# Altium PCB banana2USB_01.PcbDoc
Units mm, origin at the board's own origin, x right, y up, seen from the top; angles counter-clockwise.
Board outline 45.3 x 18 mm, 2 copper layers (Top Layer, Bottom Layer); 4 components, 5 nets, 18 pads, 35 vias.
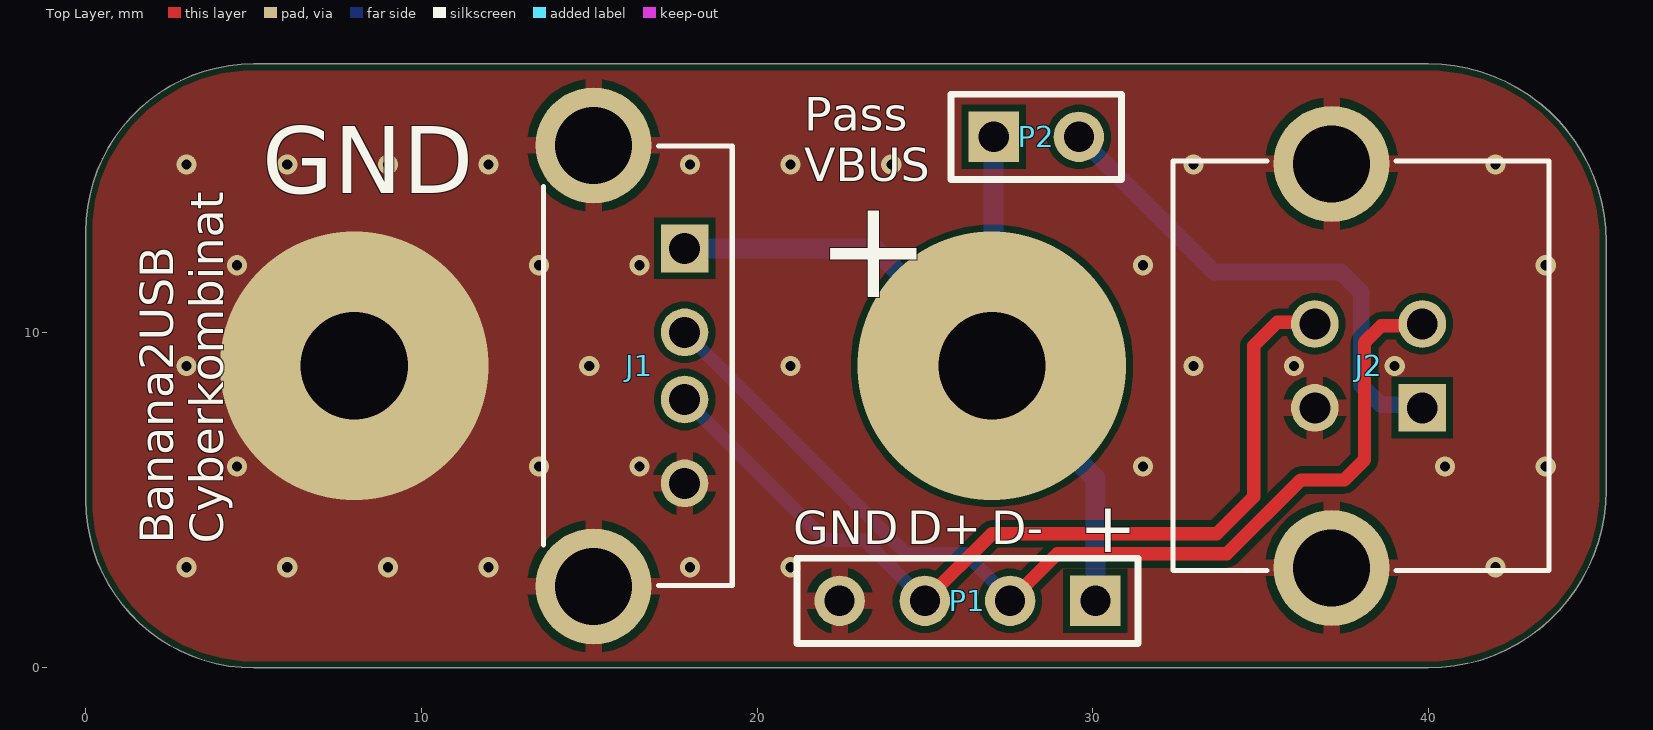
[diagram p0: Top Layer view]
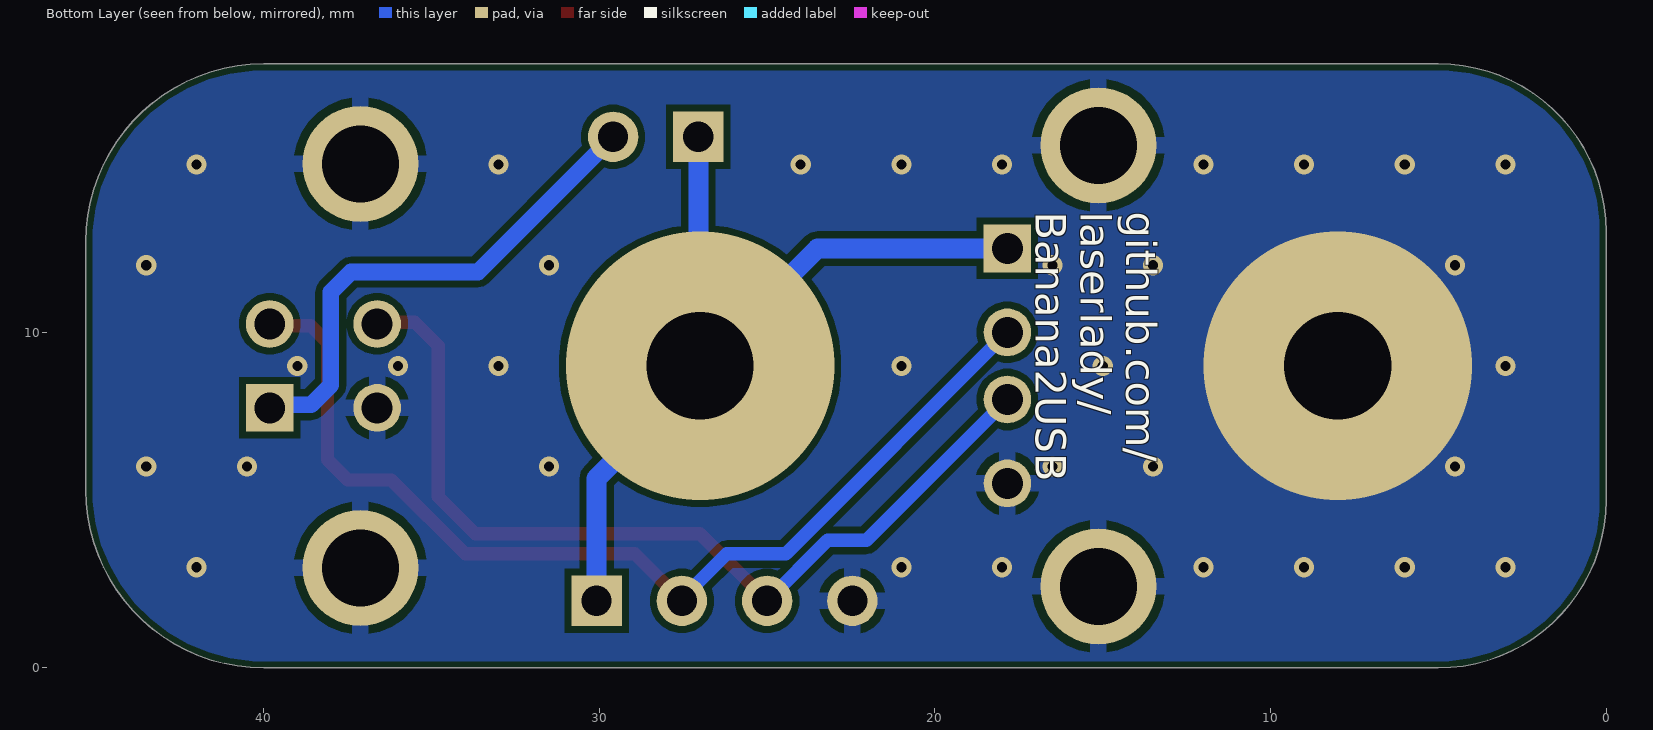
[diagram p1: Bottom Layer view, seen from below]

## Layer stack, top to bottom
Top Solder: solder mask 0.0102, Solder Resist, Dk 3.5
Top Layer: signal copper 0.0356
Dielectric 1: dielectric 0.32, FR-4, Dk 4.8
Bottom Layer: signal copper 0.0356
Bottom Solder: solder mask 0.0102, Solder Resist, Dk 3.5

## Board outline
40,0 ccw(c40,5.3) 45.3,5.3 45.3,12.7 ccw(c40,12.7) 40,18 5,18 ccw(c5,13) 0,13 0,5 ccw(c5,5) 5,0

## Design rules (kind name [scope] priority, off if disabled: settings)
BoardOutlineClearance [All] p1: gap=0.2 ignorepadtopadclearanceinfootprint=FALSE except(0.4: Arc-SplitBarrior Arc-SplitContinuation Track-SplitBarrior Track-SplitContinuation SMDPad-SplitBarrior SMDPad-SplitContinuation THPad-SplitBarrior THPad-SplitContinuation Via-SplitBarrior Via-SplitContinuation Fill-SplitBarrior Fill-SplitContinuation Poly-SplitBarrior Poly-SplitContinuation Region-SplitBarrior Region-SplitContinuation Text-SplitBarrior Text-SplitContinuation)
Clearance [All] p1: gap=0.2 ignorepadtopadclearanceinfootprint=FALSE except(0.127: Arc-Arc Arc-Track Track-Track SMDPad-SMDPad)
HoleSize [All] p1: absolutevalues=TRUE maxlimit=6.3 minlimit=0.3 maxpercent=80.000 minpercent=20.000
MinimumAnnularRing [All] p1: minimumring=0.15
MinimumSolderMaskSliver [All] p1: minsoldermaskwidth=0.1
PolygonConnect PolygonConnect_1 [All] p1: thpad.connectstyle=Relief thpad.reliefconductorwidth=0.508 thpad.reliefentries=4 thpad.polygonreliefangle="90 Angle" thpad.airgapwidth=0.254 smdpad.connectstyle=Relief smdpad.reliefconductorwidth=0.508 smdpad.reliefentries=4 smdpad.polygonreliefangle="90 Angle" smdpad.airgapwidth=0.254 via.connectstyle=Direct via.reliefconductorwidth=0.508 via.reliefentries=4 via.polygonreliefangle="90 Angle" via.airgapwidth=0.254
RoutingCorners [All] p1: cornerstyle=Round minsetback=2.54 maxsetback=2.54
RoutingVias [All] p1: holewidth=0.5 width=1 viastyle="Through Hole" minholewidth=0.2 minwidth=0.45 maxholewidth=1 maxwidth=2
SilkToSilkClearance [All] p1: silktosilkclearance=0.1
SilkToSolderMaskClearance [IsPad] p1: minsilkscreentomaskgap=0.1 clearancetoexposedcopper=TRUE
SolderMaskExpansion [All] p1: expansion=0.102 istentingtop=FALSE
Width [All] p1: maxlimit=2.54 minlimit=0.089 preferedwidth=0.381
25 further rules are at their usual default settings.

## Components (designator, comment, footprint, x,y, rotation, side; value= is the part's Value field where it differs from the comment)
J1 "USB 2.0 Type A" 614004135023 16.5,9 r270 top
J2 "USB 2.0 Type B" 61400413321 38,9 r270 top
P1 "Header 4" HDR1X4 30.08,2 r180 top
P2 "Header 2" HDR1X2 27.05,15.825 r0 top

## Footprints (in the part's own frame and the unit in brackets; to place one, negate y for a bottom-side part, rotate by r counter-clockwise, add the part's x,y. Pads: shape width x height; smd on the part's side, far side on the other; paste and mask are expansions set on the pad)
61400413321 [mm] "USB 2.0 Type B Vertical"
  rect 1.42x1.42 hole 0.92: 1(1.25,1.82)
  round 1.42 hole 0.92: 2(-1.25,1.82) 3(-1.25,-1.38) 4(1.25,-1.38)
  round 3.45 hole 2.3: S1(-6.02,-0.88) S2(6.02,-0.88)
  silkscreen extent -6.1,-5.6 6.1,5.6, body extent -7.35,-5.6 7.35,5.6, height 16.15
614004135023 [mm] "USB 2.0 Type A Vertical"
  rect 1.42x1.42 hole 0.92: 1(-3.5,1.34)
  round 1.42 hole 0.92: 2(-1,1.34) 3(1,1.34) 4(3.5,1.34)
  round 3.45 hole 2.3: S1(-6.57,-1.37) S2(6.57,-1.37)
  silkscreen extent -6.55,-2.86 6.55,2.76, body extent -8,-3.56 8,3.56, height 15.02
HDR1X2 [mm] "Connector; Header; 2 Position"
  rect 1.5x1.5 hole 0.9: 1(0,0)
  round 1.5 hole 0.9: 2(2.54,0)
  silkscreen extent -1.27,-1.27 3.81,1.27
HDR1X4 [mm] "Connector; Header; 4 Position"
  rect 1.5x1.5 hole 0.9: 1(0,0)
  round 1.5 hole 0.9: 2(2.54,0) 3(5.08,0) 4(7.62,0)
  silkscreen extent -1.27,-1.27 8.89,1.27

## Part data
J1: library part 614004135023, "USB 2.0 Type A Vertical THT WR-COM", Operating Temperature="-40 to 105 degC", Rated Current="1.5 A", ComponentLink1Description=Manufacturer, ComponentLink1URL=http://www.we-online.de, ComponentLink2Description=Datasheet, ComponentLink2URL=http://katalog.we-online.de/em/datasheet/614004135023.pdf, Gender=Female, Interface Type="USB 2.0 Type A", Mounting Technology=THT, Orientation=Vertical, Packaging=Tray, Part Number=614004135023, Published Date="May 2018", Publisher="Wurth Elektronik"
J2: library part 61400413321, "USB 2.0 Type B Vertical THT WR-COM", Operating Temperature="-40 to 105 degC", Rated Current="1.5 A", ComponentLink1Description=Manufacturer, ComponentLink1URL=http://www.we-online.de, ComponentLink2Description=Datasheet, ComponentLink2URL=http://katalog.we-online.de/em/datasheet/61400413321.pdf, Gender=Female, Interface Type="USB 2.0 Type B", Mounting Technology=THT, Orientation=Vertical, Packaging=Tray, Part Number=61400413321, Published Date="May 2018", Publisher="Wurth Elektronik"
P1: "Header, 4-Pin", LatestRevisionDate=17-Jul-2002, LatestRevisionNote="Re-released for DXP Platform.", Publisher="Altium Limited"
P2: "Header, 2-Pin", LatestRevisionDate=17-Jul-2002, LatestRevisionNote="Re-released for DXP Platform.", Publisher="Altium Limited"

## Via types
v1: diameter 0.6, hole 0.3, Top Layer to Bottom Layer, tented both sides, 33 vias
v2: diameter 8, hole 3.2, Top Layer to Bottom Layer, 2 vias

## Nets (pads, with @x,y where several pads share a name; then routed paths per layer and width w, separated by ;. In a path a pad name is that pad's centre, name@x,y a point inside that pad or via, vN(x,y) a via of type N, cw(c..) or ccw(c..) an arc to the next point about the centre after c; other vN are vias at no path point)
D+: J1.3 J2.3 P1.3 | length 27.4
  Top Layer w0.4: P1.3 27,4 33.7,4 34.8,5.1 34.8,9.6 35.5,10.3 36.57,10.3 J2.3
  Bottom Layer w0.4: J1.3 22.04,3.8 23.2,3.8 P1.3
D-: J1.2 J2.2 P1.2 | length 30.8
  Top Layer w0.4: P1.2 28.94,3.4 34,3.4 36.2,5.6 37.5,5.6 38.1,6.2 38.1,9.7 38.6,10.2 39.77,10.2 J2.2
  Bottom Layer w0.4: J1.2 24.44,3.4 26.2,3.4 27.54,2.06 P1.2
GND: J1.4 J1.S1 J1.S2 J2.4 J2.S1 J2.S2 P1.4
  other v1: 3,3 6,3 9,3 12,3 18,3 21,3 42,3 4.5,6 13.5,6 16.5,6 31.5,6 40.5,6 43.5,6 3,9 15,9 21,9 33,9 36,9 39,9 4.5,12 13.5,12 16.5,12 31.5,12 43.5,12 3,15 6,15 9,15 12,15 18,15 21,15 24,15 33,15 42,15
  other v2: 8,9
NetJ2_1: J2.1 P2.2 | length 15.2
  Bottom Layer w0.5: P2.2 33.615,11.8 37.4,11.8 38,11.2 38,8.427 38.585,7.842 39.728,7.842 J2.1
VBUS: J1.1 P1.1 P2.1 | length 25.7
  Bottom Layer w0.6: J1.1 23.5,12.5 v2(27,9) ; P2.1 27.05,9.05 v2(27,9) ; P1.1 30.08,5.647 27,8.727 v2(27,9)

## Polygon pours and split planes (outlines as drawn)
GND on Top Layer "GND_L01_P000" (solid, pour order 0): 0,18 0,0 45.3,0 45.3,18
GND on Bottom Layer "GND_L02_P001" (solid, pour order 1): 0,18 45.3,18 45.3,0 0,0

## Silkscreen, mask and mechanical layers (free items; w line width, h text height)
Top Overlay:
  text "Pass / VBUS" at 21.4,14.5 h1
  text "GND" at 5.25,14.15 h2
  text "+" at 21.75,11.05 h3
  text "Banana2USB / Cyberkombinat" at 4.1,3.7 h1 r90
  text "GND" at 21.08,3.68 h1
  text "D+" at 24.48,3.68 h1
  text "D-" at 26.98,3.68 h1
  text "+" at 29.6,3.45 h1.5
Bottom Overlay:
  text "github.com/ / laserlady/ / Banana2USB" at 17,13.6 h0.9 r90
Board:
  the board outline again, w0.1

## Text inside footprints (layer, text, board x,y; h text height)
J1: Mechanical 1 "PCB Thickness 1.6mm" at 12.4,12.4 h0.76 r270